# Altium PCB PCB_PAD_DW_12864_2021-08-01.pcbdoc
Units mm, origin at the board's own origin, x right, y up, seen from the top; angles counter-clockwise.
Board outline 121.45 x 121.45 mm, 2 copper layers (Top Layer, Bottom Layer); 1 components, 2 nets, 11 pads, 0 vias.
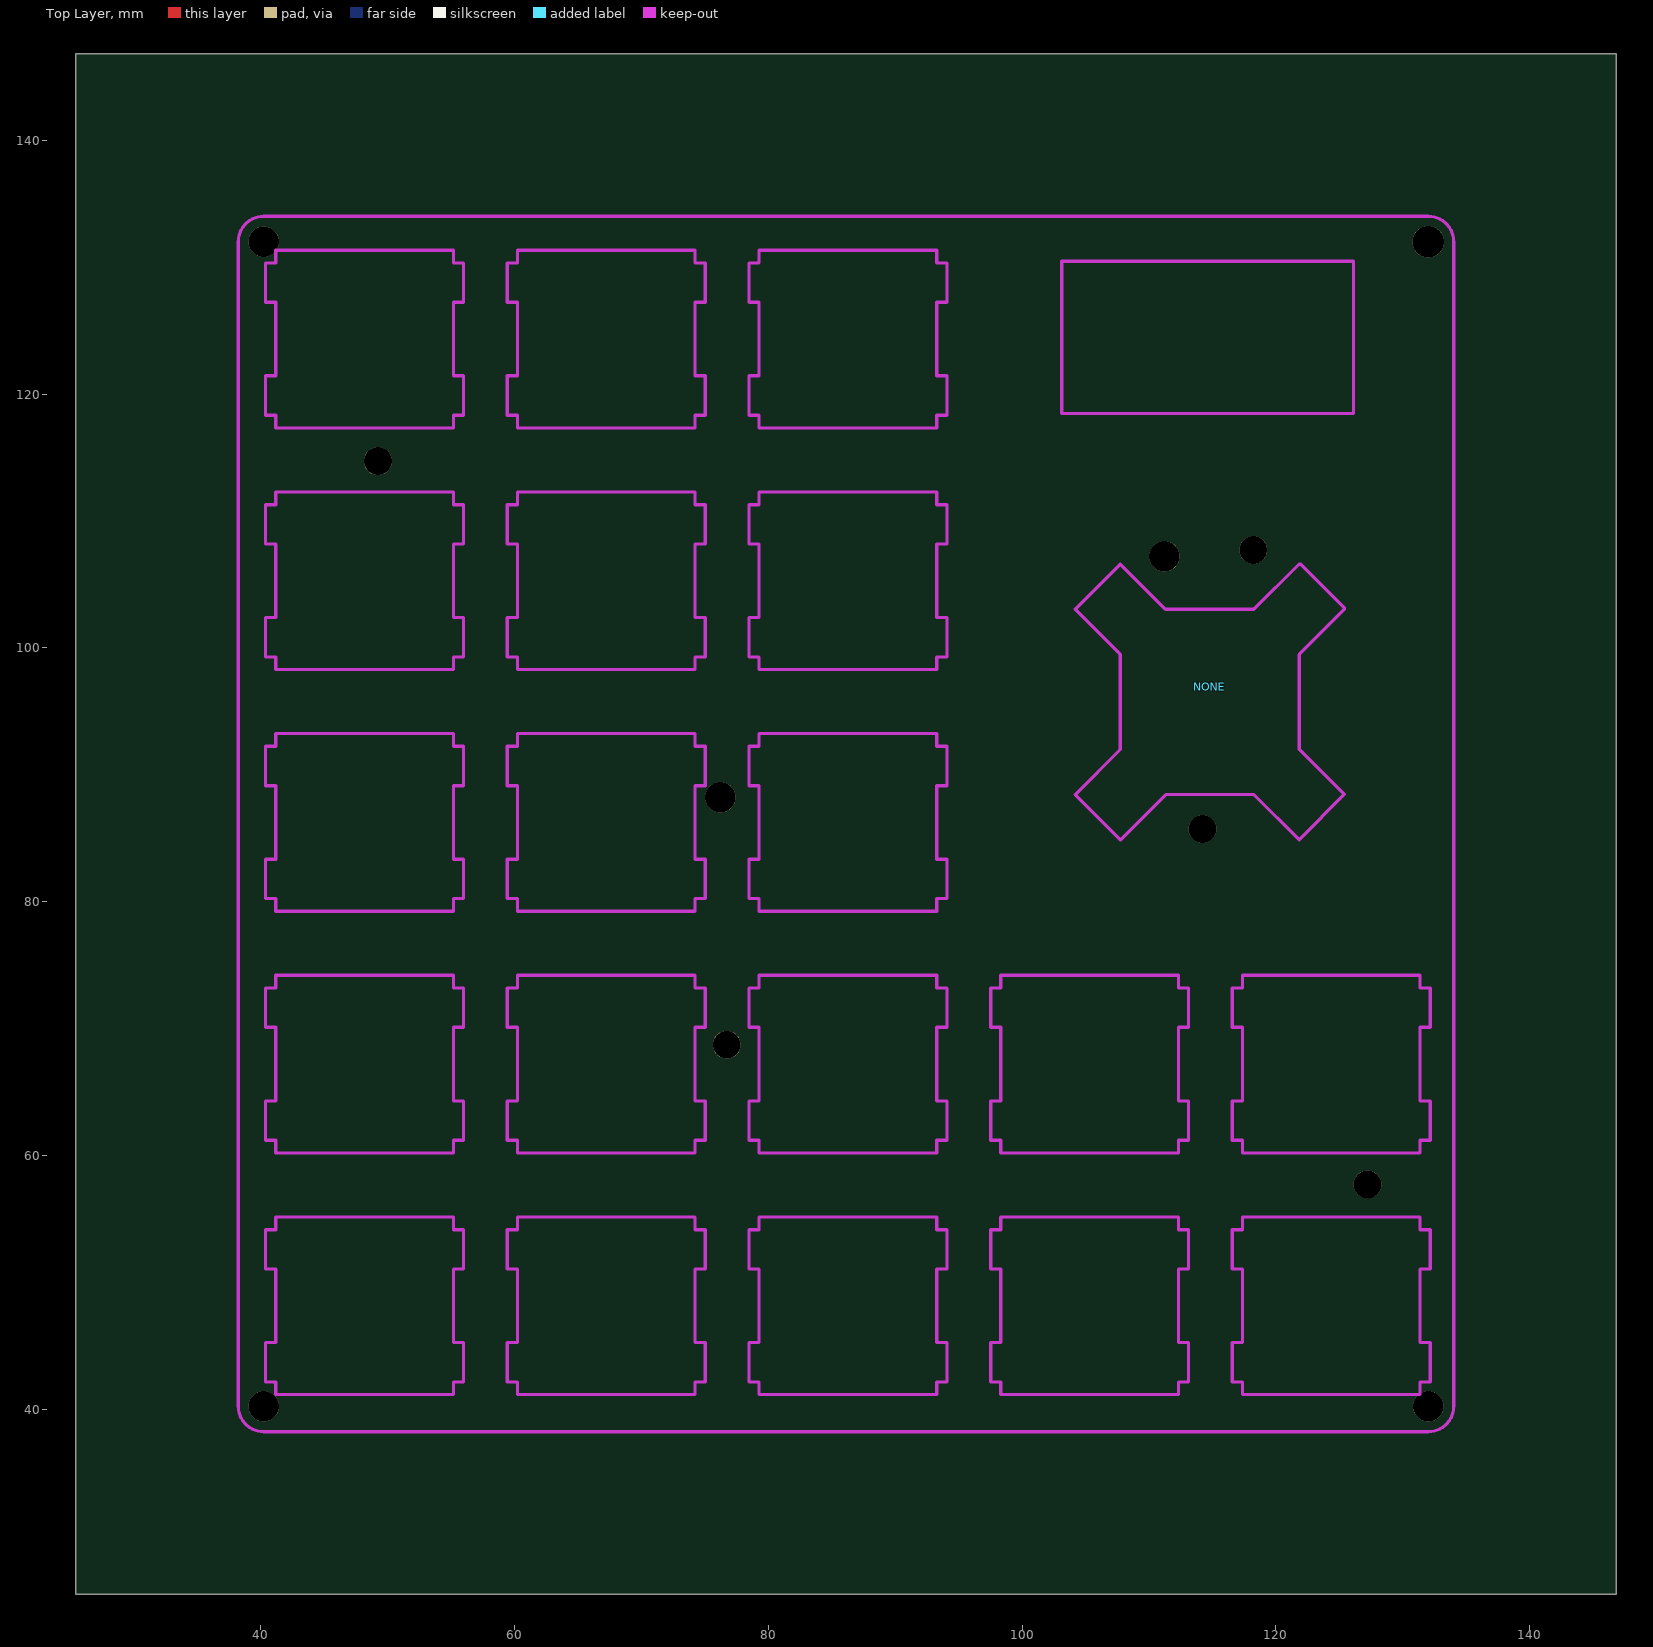
[diagram p0: Top Layer view]
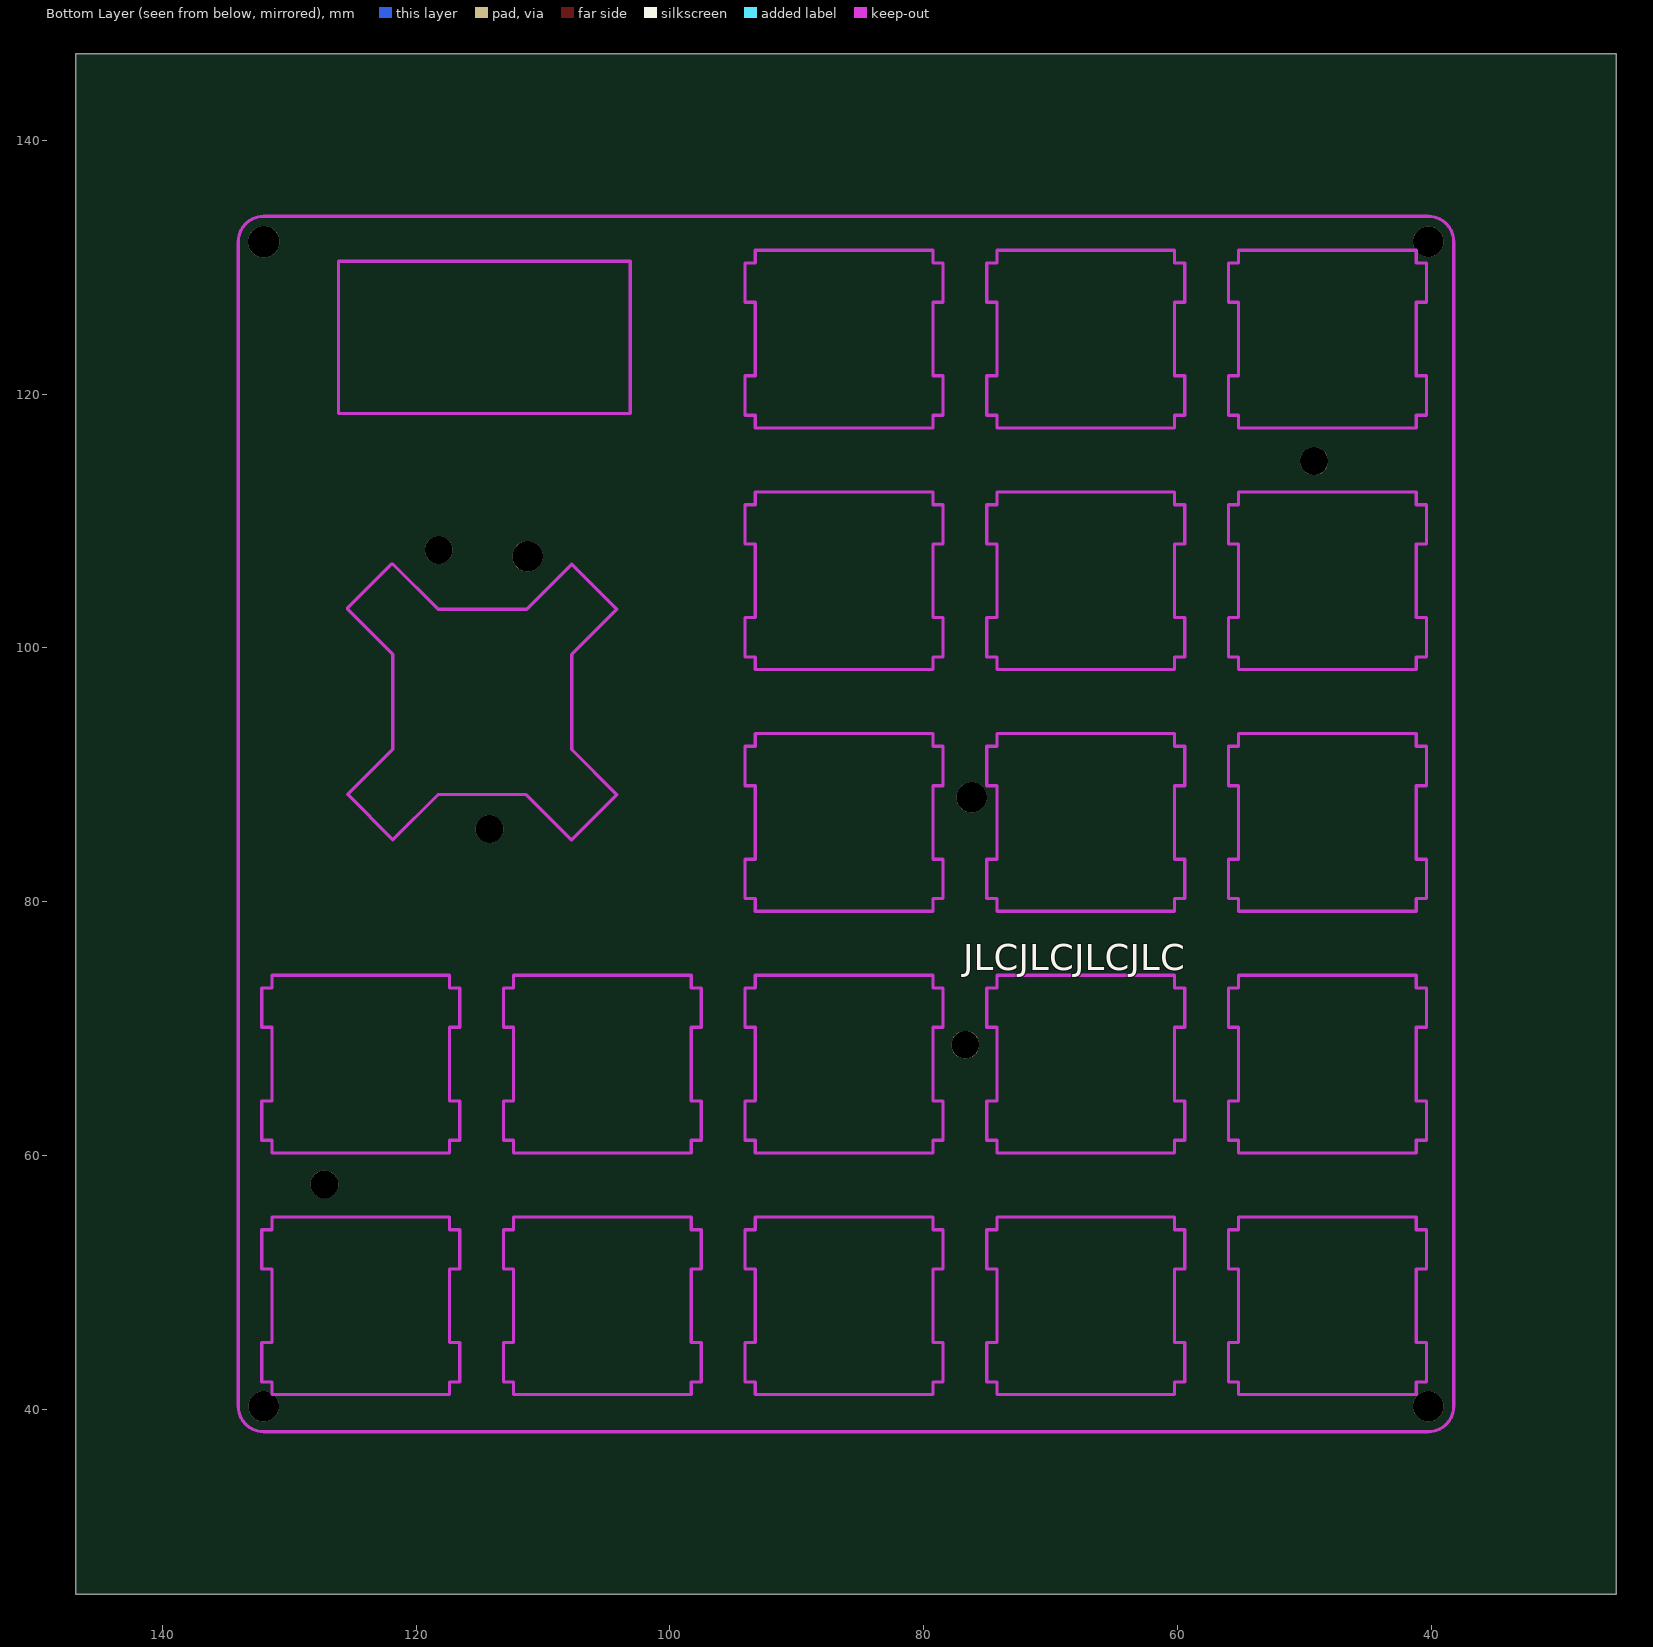
[diagram p1: Bottom Layer view, seen from below]

## Layer stack, top to bottom
Top Layer: signal copper (thickness not stored)
Dielectric: dielectric 0.32, FR-4, Dk 4.8
Bottom Layer: signal copper (thickness not stored)

## Board outline
146.854,25.4 25.4,25.4 25.4,146.854 146.854,146.854

## Components (designator, comment, footprint, x,y, rotation, side; value= is the part's Value field where it differs from the comment)
NONE "_" ? 114.796,96.96 r0 top

## Footprints (in the part's own frame and the unit in brackets; to place one, negate y for a bottom-side part, rotate by r counter-clockwise, add the part's x,y. Pads: shape width x height; smd on the part's side, far side on the other; paste and mask are expansions set on the pad)
? [mm]
  Keep-Out Layer lines w0.254: 7.049,-4.959 7.049,2.534 10.605,6.09 10.605,6.217 7.176,9.646 7.036,9.646 3.48,6.09 -3.492,6.09 -7.048,9.646 -10.604,6.09 -7.048,2.534 -7.048,-4.959 -10.604,-8.515 -7.048,-12.071 -7.01,-12.071 -3.454,-8.515 3.493,-8.515 7.049,-12.071 10.605,-8.5 7.049,-4.944

## Free pads (board coordinates)
  round 2.4 hole 2.4 unplated: ""(40.227,40.227) ""(40.227,132.027) ""(76.227,88.227) ""(111.227,107.227) ""(132.027,40.227)
  round 2.2 hole 2.2 unplated: ""(49.227,114.727) ""(76.727,68.727) ""(114.227,85.727) ""(118.227,107.727) ""(127.227,57.727)
  round 2.5 hole 2.5 unplated: ""(132.027,132.027)

## Nets (pads, with @x,y where several pads share a name; then routed paths per layer and width w, separated by ;. In a path a pad name is that pad's centre, name@x,y a point inside that pad or via, vN(x,y) a via of type N, cw(c..) or ccw(c..) an arc to the next point about the centre after c; other vN are vias at no path point)
S$5023: 
S$10769: 

## Keep-outs
Keep-Out Layer:
  lines w0.254: 38.227,40.227 ccw(c40.227,40.227) 40.227,38.227 ; 38.227,132.027 cw(c40.227,132.027) 40.227,134.027 ; 132.027,38.227 ccw(c132.027,40.227) 134.027,40.227 ; 132.027,134.027 cw(c132.027,132.027) 134.027,132.027

## Silkscreen, mask and mechanical layers (free items; w line width, h text height)
Bottom Overlay:
  text "JLCJLCJLCJLC" at 76.867,74.581 h2.03
Document:
  lines w0.003: 86.102,86.102 86.152,86.152